# Altium PCB led_flasher.PcbDoc
Units mm, origin at the board's own origin, x right, y up, seen from the top; angles counter-clockwise.
Board outline 32.13 x 26.29 mm, 2 copper layers (Top Layer, Bottom Layer), stack 1.1 mm thick; 7 components, 6 nets, 22 pads, 13 vias.
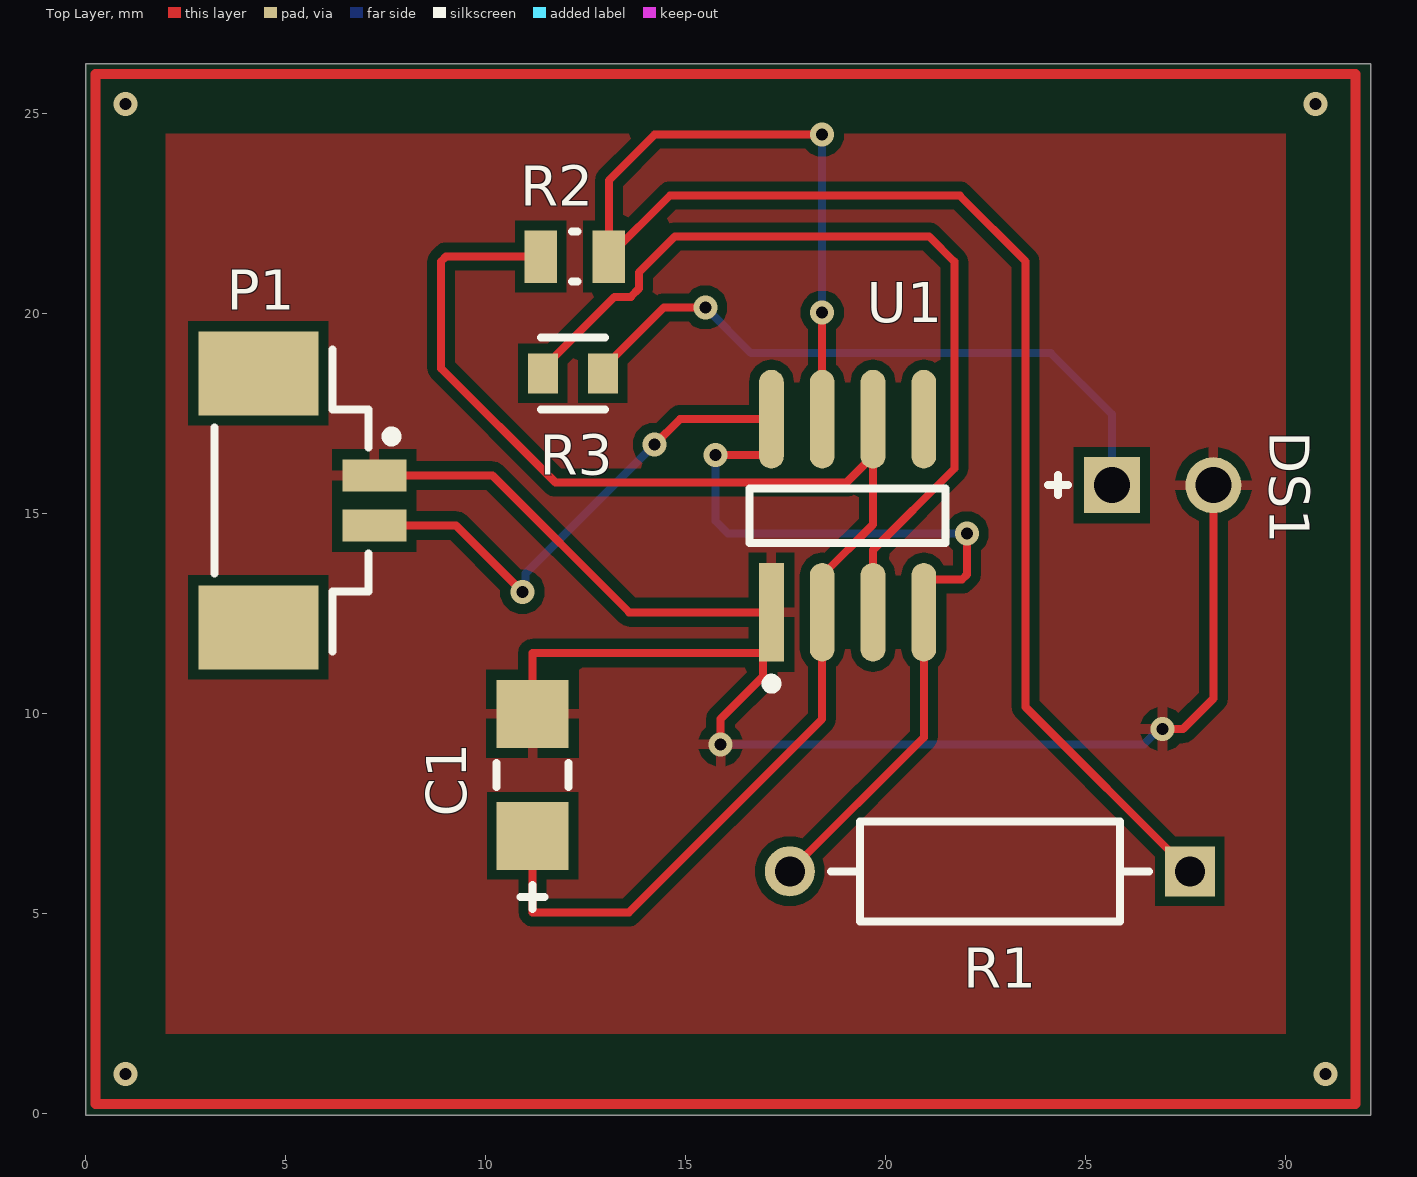
[diagram p0: Top Layer view]
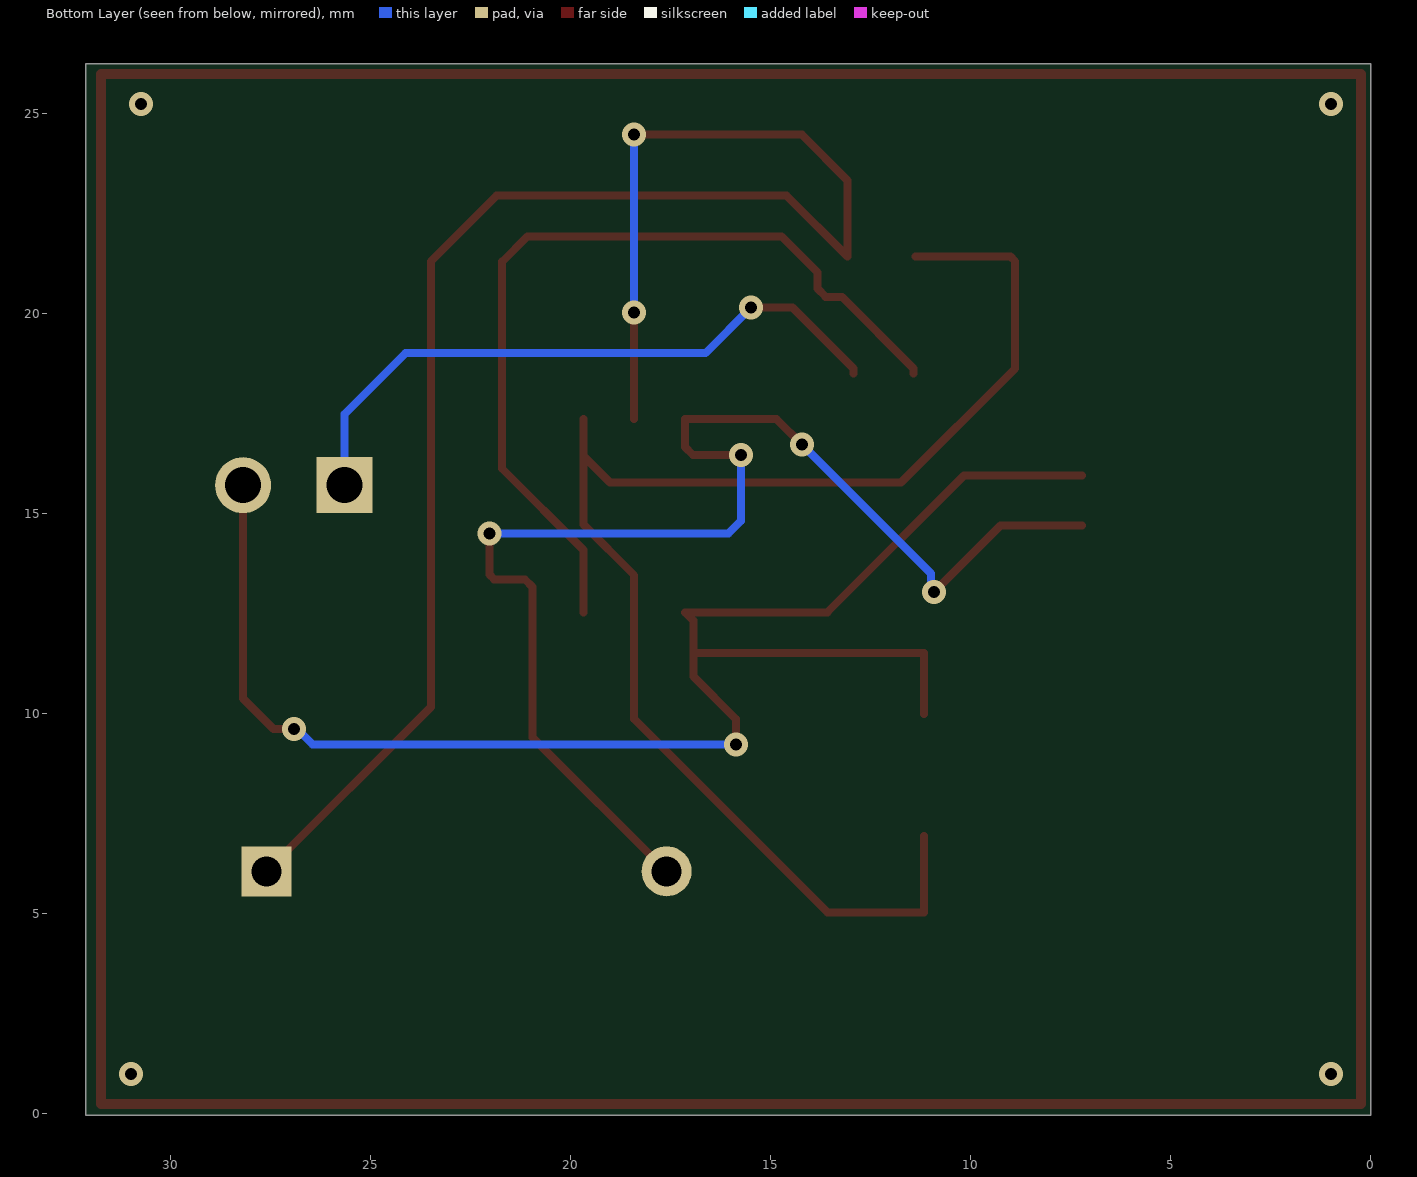
[diagram p1: Bottom Layer view, seen from below]
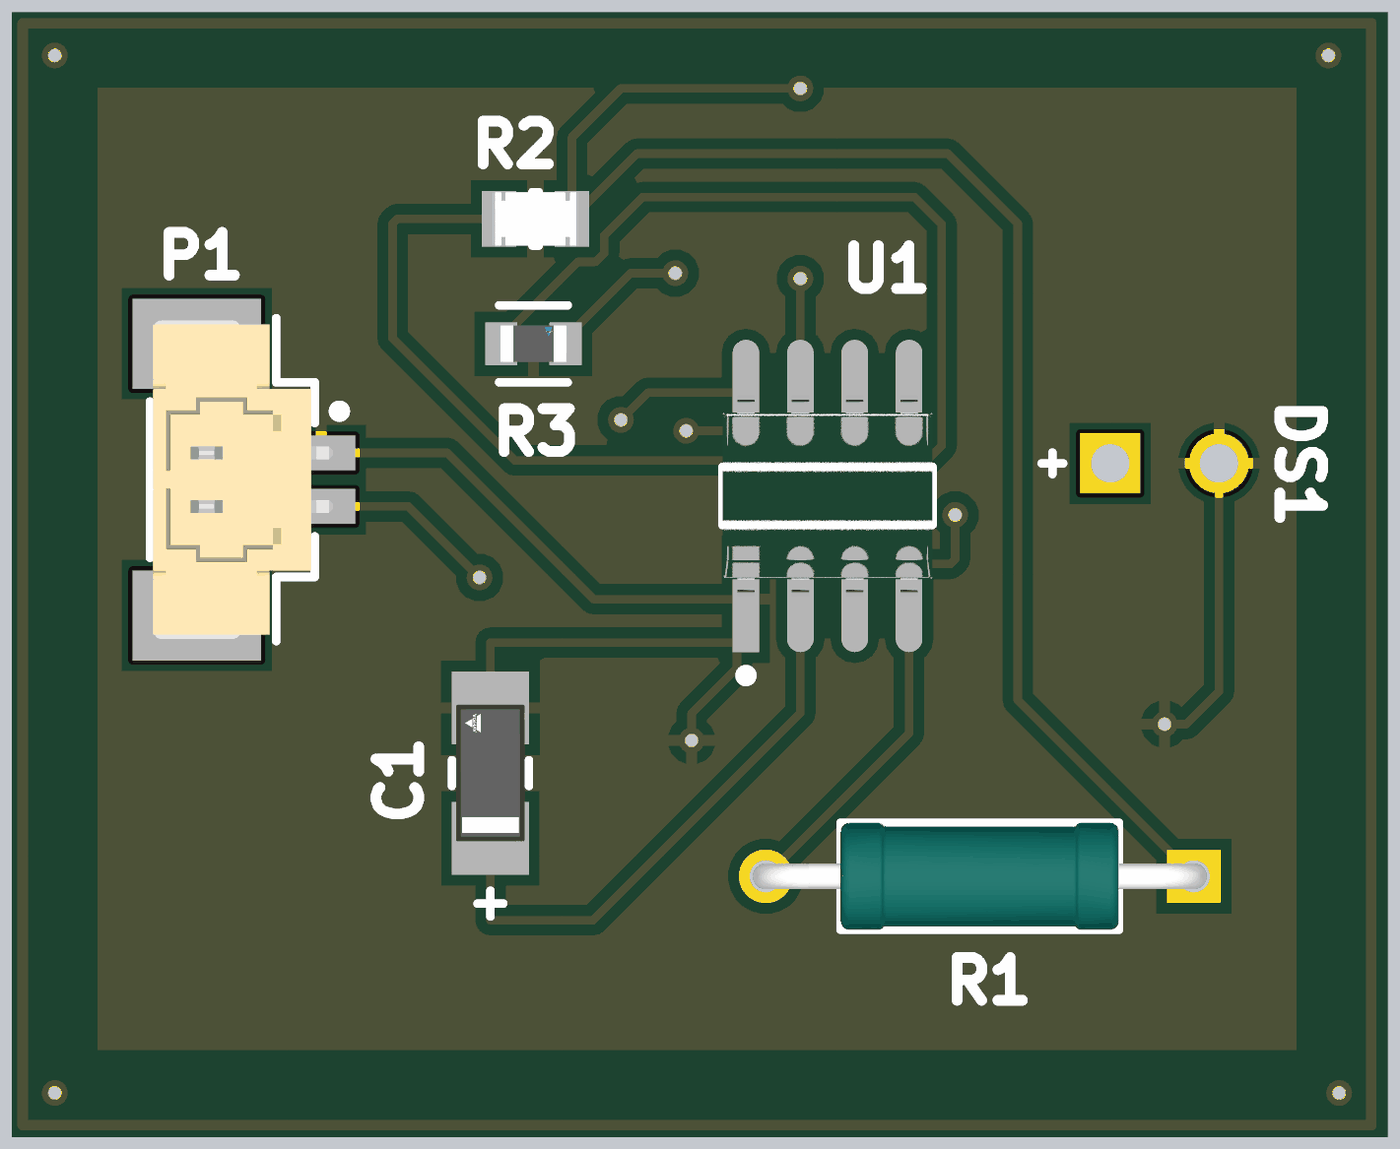
[diagram p2: 3D render of the assembled board from above, using the file's embedded part models]

## Layer stack, top to bottom
Top Solder: solder mask 0.05, SM-001, Dk 4
Top Layer: signal copper 0.1
Dielectric 1: dielectric 0.9, FR-4, Dk 4.8
Bottom Layer: signal copper 0.1
Bottom Solder: solder mask 0.05, SM-001, Dk 4

## Board outline
0,26.257 0,-0.032 32.131,-0.032 32.131,26.257

## Design rules (kind name [scope] priority, off if disabled: settings)
Clearance [All] p1: gap=0.25 ignorepadtopadclearanceinfootprint=FALSE
MinimumSolderMaskSliver [All] p1: minsoldermaskwidth=0.15
PolygonConnect [All] p1: connectstyle=Relief reliefconductorwidth=0.254 reliefentries=4 polygonreliefangle="90 Angle" airgapwidth=0.254
RoutingVias [All] p1: holewidth=0.4 width=0.5 viastyle="Through Hole" minholewidth=0.4 minwidth=0.5 maxholewidth=0.4 maxwidth=0.5
SilkToSolderMaskClearance [IsPad] p1: minsilkscreentomaskgap=0.1 clearancetoexposedcopper=TRUE
SolderMaskExpansion [All] p1: expansion=0.102 istentingtop=FALSE
UnRoutedNet [All] p1: checkbadconnections=TRUE
Width [All] p1: maxlimit=0.56 minlimit=0.1 preferedwidth=0.2
27 further rules are at their usual default settings.

## Components (designator, comment, footprint, x,y, rotation, side; value= is the part's Value field where it differs from the comment)
C1 "293D105X0016A2TE3" FP-293DA-MFG 11.176,8.477 r270 top
DS1 "LTL-1CHG" LTST-LTL-1CHG-2 26.924,15.716 r0 top
P1 "653102124022" 653102124022 5.148,15.335 r270 top
R1 "MRS25000C1001FCT00" FP-MRS25-MFG 22.606,6.064 r180 top
R2 "CRCW0805470KFKEA" FP-CRCW0805-e3-IPC_C 12.23,21.431 r0 top
R3 "CRCW0603330RFKEA" FP-CRCW0603-e3-MFG 12.18,18.51 r0 top
U1 "NE555DR" FP-D0008A-IPC_A 19.05,14.954 r90 top

## Footprints (in the part's own frame and the unit in brackets; to place one, negate y for a bottom-side part, rotate by r counter-clockwise, add the part's x,y. Pads: shape width x height; smd on the part's side, far side on the other; paste and mask are expansions set on the pad)
653102124022 [mm] "1.25mm SMT Male Vertical Shrouded Header, 2p"
  rect 0.81x1.6 smd: 1(-0.625,2.07) 2(0.625,2.07)
  rect 2.1x3 smd: MP1(-3.175,-0.83) MP2(3.175,-0.83)
  silkscreen extent -3.77,-1.92 3.77,2.62, body extent -3.72,-1.85 3.72,2.36, height 4.74
FP-293DA-MFG [mm]
  rect 1.7x1.8 smd paste+0 mask+0: 1(-1.525,0) 2(1.525,0)
  silkscreen extent -0.3,-0.9 3.35,0.9, body extent -2.47,-1 2.47,1, height 0.25
FP-CRCW0603-e3-MFG [mm]
  rect 0.75x1 smd paste+0 mask+0: 1(-0.75,0) 2(0.75,0)
  silkscreen extent -0.8,-0.9 0.8,0.9, body extent -1.22,-0.6 1.22,0.6, height 0.25
FP-CRCW0805-e3-IPC_C [mil]
  rect 31.75x51.5 smd paste+0 mask+0: 1(-33.5,0) 2(33.5,0)
  silkscreen extent -3,-25 3,25, body extent -53,-31 53,31, height 10
FP-D0008A-IPC_A [mm]
  rect 2.469x0.622 smd paste+0 mask+0: 1(-2.414,1.905)
  rrect100% 2.469x0.622 smd paste+0 mask+0: 2(-2.414,0.635) 3(-2.414,-0.635) 4(-2.414,-1.905) 5(2.414,-1.905) 6(2.414,-0.635) 7(2.414,0.635) 8(2.414,1.905)
  silkscreen extent -4.32,-2.45 0.68,2.45, body extent -4.15,-2.95 4.15,2.95, height 0.25
FP-MRS25-MFG [mm]
  rect 1.25x1.25 hole 0.75 paste-2539.97 mask+0: 1(-5,0)
  round 1.25 hole 0.75 paste-2539.97 mask+0: 2(5,0)
  silkscreen extent -3.98,-1.25 3.98,1.25, body extent -5.72,-1.35 5.72,1.35, height 0.25
LTST-LTL-1CHG-2 [mm] "TH, 2-Leads, Dia 3.8mm"
  rect 1.4x1.4 hole 0.9: 1(-1.27,0)
  round 1.4 hole 0.9: 2(1.27,0)
  silkscreen extent -2.87,-0.25 -2.37,0.25, body extent -1.9,-1.9 1.9,1.9, height 6.5

## Part data
C1: library part CMP-00030-40940187-1, "293D105X0016A2TE3 Surface Mount Tantalum Capacitor, 1 uF, 16 V, ± 20%, -55 °C, 125 °C, 1206 [3216-18 Metric]", Capacitance=1µF, Case Code (Imperial)=1206, Case Code (Metric)=3216, Dielectric Material=Tantalum, ESR (Equivalent Series Resistance)=9.3Ω, Leakage Current=500nA, Max Operating Temperature=125°C, Min Operating Temperature=-55°C, Ripple Current=90mA, Tolerance=20%, Voltage Rating=16V, Case/Package=1206, Depth=1.6mm, Dissipation Factor=4%, Features="General Purpose", Height=1.8mm, Height - Seated (Max)=1.8034mm, Lead Free="Lead Free", Length=3.2mm, Mount="PCB, Surface Mount", NexarPartId=40940187, Number of Pins=2, Packaging="Tape and Reel", Polarity=Polar, Radiation Hardening=No, REACH SVHC=Unknown, RoHS=Compliant, Schedule B="8532210050, 8532210050", Termination=SMD/SMT, Voltage Rating (DC)=16V, Width=1.6002mm
DS1: library part CMP-1674-00014-1, "LITE-ON Electronic, INC, 120 mA, 100 mW, 5 V, -55 to 100 degC, 2-Pin THD, RoHS, Bulk", Case\Package=QFN, Max Operating Temperature="85 degC", Max Supply Voltage="3.6 V", Min Operating Temperature="-40 degC", Min Supply Voltage="2.5 V", Package Quantity=5000, ComponentLink1Description="Manufacturer URL", ComponentLink1URL=http://www.us.liteon.com/, ComponentLink2Description=Datasheet, ComponentLink2URL=http://datasheet.octopart.com/LTL-1CHG-Lite-On-datasheet-143841.pdf, DatasheetVersion=Mar-00, Interface=I2C, PackageDescription="2-Pin Through Hole Device, Dia 3.8 mm", PackageReference=LTL-1CHG, Packaging="Cut Tape", Pins=24, REACH SVHC="No SVHC", RoHSCompliant=true
P1: library part CMP-1502-00757-2, Color="Beige, White", Contact Resistance=20mΩ, Current Rating=1A, Flammability Rating="UL94 V-0", Insulation Resistance=100MΩ, Max Operating Temperature=85°C, Min Operating Temperature=-40°C, Operating Supply Voltage=125V, Connector Type="Male Pin", Contact Gender=Male, Contact Material=Copper, Contact Mating Length=2.159mm, Contact Plating=Tin, Gender=Male, Height=4.75mm, Housing Material=Nylon, Insulation=Insulated, Lead Pitch=1.25mm, Length=7.25mm, Mount="Surface Mount", NexarPartId=18818273, Number of Contacts=2, Number of Pins=2, Number of Positions=2, Number of Rows=1, Orientation=Vertical, Packaging="Tape and Reel", Pitch=1.25mm, REACH SVHC=Unknown, RoHS=Compliant, Termination=SMD/SMT, Voltage Rating=125V, Width=7.25mm
R1: library part CMP-02408-000051-1, "RES 1K OHM 0.6W 1% AXIAL", Case/Package=Axial, Max Operating Temperature=155°C, Max Power Dissipation=600mW, Min Operating Temperature=-55°C, Package Quantity=5000, Resistance=1kR, Resistance Tolerance=1%, Resistor Type="Metal Film", Temperature Coefficient=50ppm/°C, Voltage Rating=350V, Construction=Cylindrical, Contact Plating=Tin, Diameter=2.5mm, Lead Diameter=0.6mm, Lead Free="Lead Free", Length=6.5mm, Military Standard=Not, Mount="Through Hole", Number of Pins=2, Number of Terminations=2, Packaging="Tape and Reel", Power Rating=600mW, Radiation Hardening=No, RoHS Compliant=Yes, Series=MRS25, Technology="THIN FILM", Termination=Axial, Tolerance=1%, Voltage Rating (DC)=350V, Weight=0.00776oz, Width=2.5mm
R2: library part CMP-2001-03930-2, "RES Thick Film, 470kΩ, 1%, 0.125W, 100ppm/°C, 0805", Case Code (Imperial)=0805, Case Code (Metric)=2012, Max Operating Temperature=155°C, Max Power Dissipation=125mW, Min Operating Temperature=-55°C, Package Quantity=10, Resistance=470kR, Temperature Coefficient=100ppm/°C, Tolerance=1%, Voltage Rating=150V, Case/Package=0805, Composition="Thick Film", Contact Plating=Tin, Depth=1.25mm, Features="Automotive AEC-Q200", Height=0.45mm, Lead Free="Lead Free", Length=2mm, Military Standard=Not, Number of Pins=2, Number of Terminations=2, Packaging="Tape and Reel", Power Rating=125mW, Radiation Hardening=No, Termination=SMD/SMT, Voltage Rating (DC)=150V, Weight=0.000194oz, Width=0.049inch
R3: library part CMP-1012-00454-3, "RES Thick Film, 330Ω, 1%, 0.1W, 100ppm/°C, 0603", Case Code (Imperial)=0603, Case Code (Metric)=1608, Max Operating Temperature=155°C, Max Power Dissipation=100mW, Min Operating Temperature=-55°C, Package Quantity=10, Resistance=330R, Temperature Coefficient=100ppm/°C, Tolerance=1%, Voltage Rating=75V, Case/Package=0603, Composition="Thick Film", Contact Plating=Tin, Depth=0.85mm, Features="Automotive AEC-Q200", Height=0.45mm, Lead Free="Lead Free", Length=1.55mm, Military Standard=Not, Mount="Surface Mount", Number of Terminations=2, Packaging="Tape and Reel", Power Rating=100mW, Radiation Hardening=No, Termination=SMD/SMT, Voltage Rating (DC)=75V, Weight=7.1E-05oz, Width=0.033inch
U1: library part CMP-1685-00007-2, "IC OSC SGL TIMER 100KHZ 8-SOIC", Case/Package=SOIC, Frequency=100kHz, High Level Output Current=-200mA, Low Level Output Current=200mA, Max Operating Temperature=70°C, Max Supply Voltage=16V, Min Operating Temperature=0°C, Min Supply Voltage=4.5V, Operating Supply Current=10mA, Package Quantity=2500, Quiescent Current=15mA, Contact Plating=Gold, Height=1.58mm, Lead Free="Lead Free", Length=4.9mm, Mount="Surface Mount", Number of Pins=8, Number of Timers/Counters=1, Packaging="Tape and Reel", Radiation Hardening=No, REACH SVHC="No SVHC", Weight=0.002561oz, Width=3.91mm

## Via types
v1: diameter 0.6, hole 0.3, Top Layer to Bottom Layer, tented both sides, 13 vias

## Nets (pads, with @x,y where several pads share a name; then routed paths per layer and width w, separated by ;. In a path a pad name is that pad's centre, name@x,y a point inside that pad or via, vN(x,y) a via of type N, cw(c..) or ccw(c..) an arc to the next point about the centre after c; other vN are vias at no path point)
GND: C1.1 DS1.2 P1.1 U1.1 | length 40.6
  Top Layer w0.2: P1.1 10.17,15.96 13.59,12.54 U1.1 16.934,12.329 U1.1@16.934,11.525 ; C1.1 11.176,11.525 U1.1@16.934,11.525 ; v1(15.875,9.239) 15.875,9.874 16.934,10.933 U1.1@16.934,11.525 ; v1(26.924,9.62) 27.432,9.62 28.194,10.382 DS1.2
  Bottom Layer w0.2: v1(15.875,9.239) 26.456,9.239 26.837,9.62 v1(26.924,9.62)
NetC1_2: C1.2 R2.1 U1.2 U1.6 | length 36.6
  Top Layer w0.2: C1.2 11.176,5.038 13.579,5.038 18.415,9.874 U1.2 18.415,13.464 19.685,14.734 U1.6@19.685,16.444 ; R2.1 9.007,21.431 8.89,21.314 8.89,18.637 11.744,15.783 19.024,15.783 U1.6@19.685,16.444 ; U1.6 U1.6@19.685,16.444
NetDS1_1: DS1.1 R3.2 | length 16.4
  Top Layer w0.2: R3.2 12.93,18.635 14.456,20.161 v1(15.494,20.161)
  Bottom Layer w0.2: v1(15.494,20.161) 16.637,19.018 24.13,19.018 25.654,17.494 DS1.1
NetR1_1: R1.1 R2.2 U1.7 | length 43.5
  Top Layer w0.2: U1.7 v1(18.415,20.034) ; v1(18.415,24.479) 14.224,24.479 13.081,23.336 R2.2 14.605,22.955 21.855,22.955 23.495,21.315 23.495,10.175 R1.1
  Bottom Layer w0.2: v1(18.415,20.034) v1(18.415,24.479)
NetR3_1: R3.1 U1.3 | length 21.9
  Top Layer w0.2: R3.1 11.43,18.635 13.222,20.427 13.629,20.427 13.834,20.632 13.834,21.039 14.734,21.939 21.082,21.939 21.717,21.304 21.717,16.13 19.685,14.098 U1.3
Vcc: P1.2 R1.2 U1.4 U1.8 | length 33.6
  Top Layer w0.2: P1.2 9.261,14.71 v1(10.922,13.049) ; v1(14.224,16.732) 14.86,17.368 U1.8 17.145,16.673 16.95,16.478 v1(15.748,16.478) ; R1.2 20.955,9.413 U1.4 20.955,13.169 21.15,13.364 21.915,13.364 22.032,13.481 v1(22.032,14.512)
  Bottom Layer w0.2: v1(10.922,13.049) 10.999,13.126 10.999,13.507 v1(14.224,16.732) ; v1(15.748,16.478) 15.748,14.827 16.063,14.512 v1(22.032,14.512)
pads on no net: P1.MP1 P1.MP2 U1.5
copper on no net: | length 114.5
  Top Layer w0.25: 0.25,0.25 31.75,0.25 31.75,26 0.25,26 0.25,0.25
  other v1: 1,1 31,1 1,25.25 30.75,25.25

## Polygon pours and split planes (outlines as drawn)
GND on Top Layer "GND_L01_P000" (solid, remove dead copper, pour order 0): 2,24.5 2,2 30,2 30,24.5

## Silkscreen, mask and mechanical layers (free items; w line width, h text height)
Top Courtyard:
  text "aLucarD" at 13.525,0.63 h2